# EAGLE board rpicam (EAGLE 6.4)
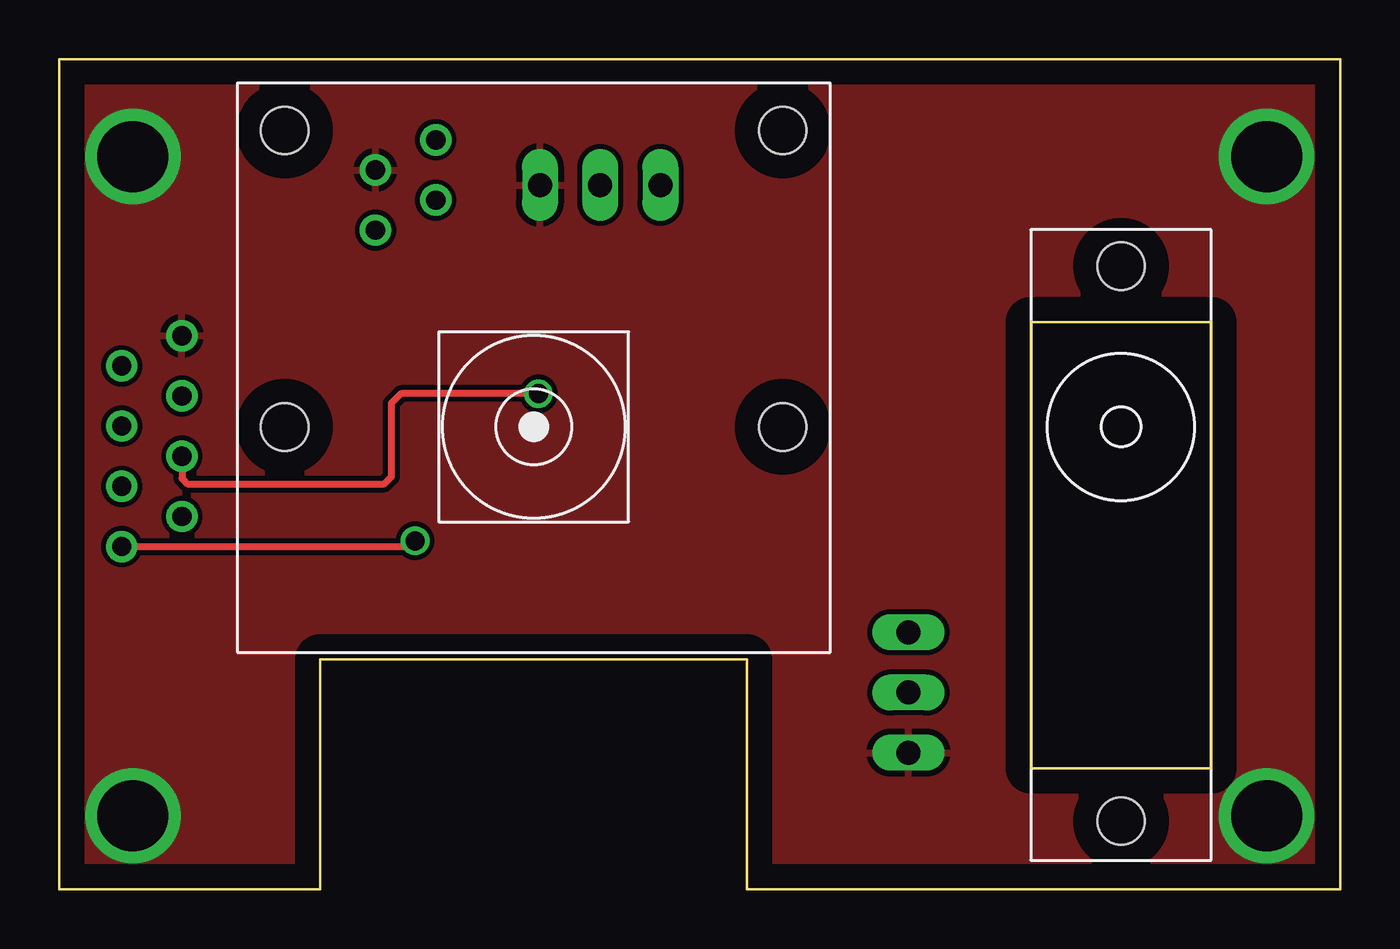
[diagram p0: board, top side]
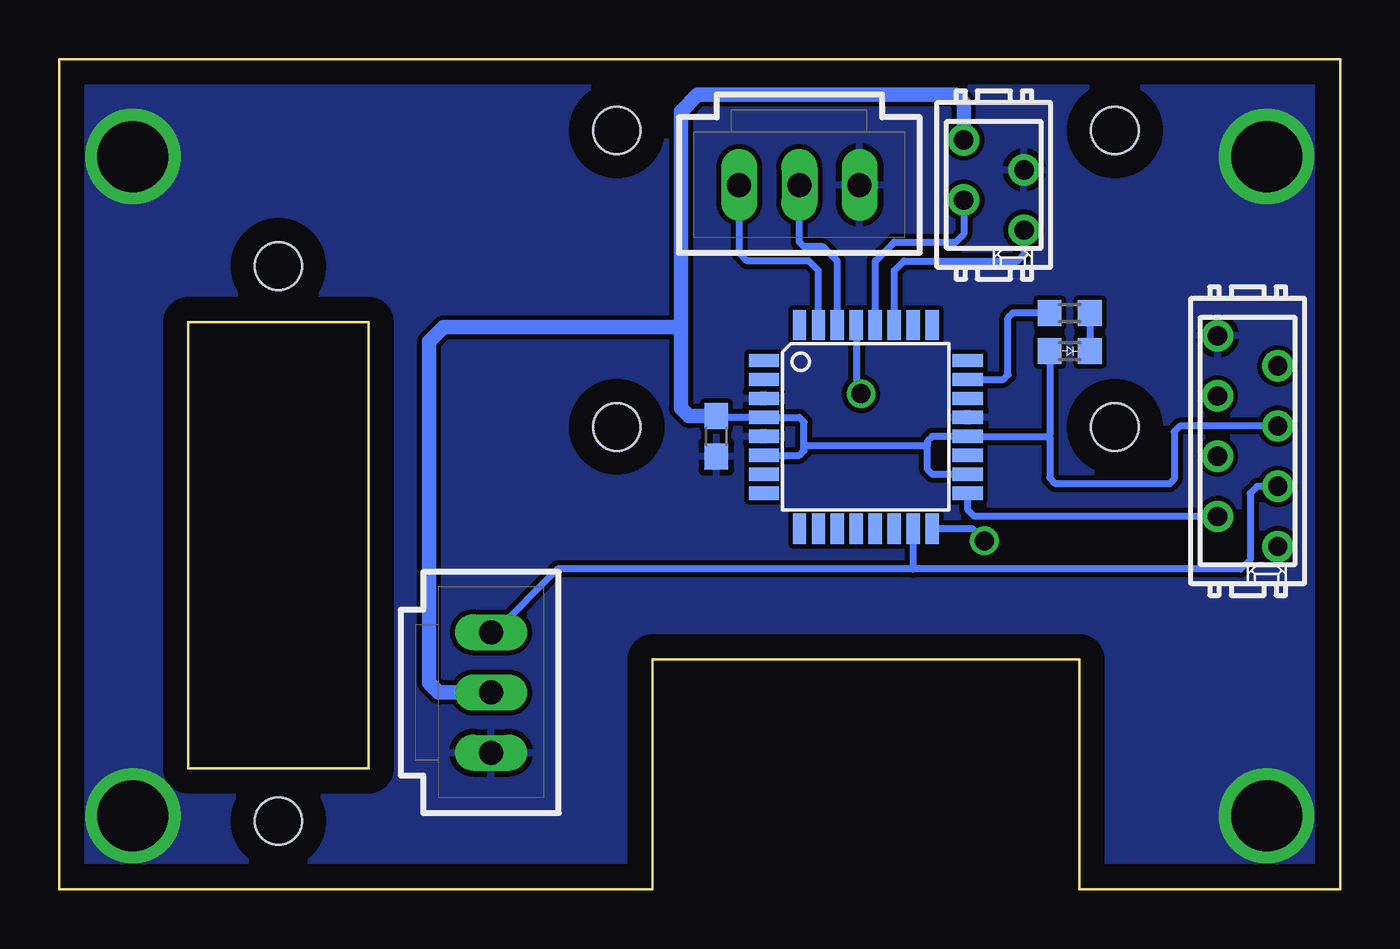
[diagram p1: board, bottom side, seen from below]

Size 54 x 35 mm. Coordinates in mm from the lower left corner, seen from the top.
Outline: 0,35 54,35 54,0 29,0 29,9.7 11,9.7 11,0 0,0 0,35
Copper layers (1*16): Top 0.035mm / dielectric 1.5mm / Bottom 0.035mm
Design rules "default": minimum track width 10mil, minimum drill 24mil, track to track 8mil, track to pad 8mil, pad to pad 8mil, via to via 8mil, smd to smd 8mil, copper to edge 40mil, drill to drill 8mil, minimum pad ring 10mil, minimum via ring 8mil, stop-mask expansion 4mil, vias tented up to drill 0mil, thermal gap 10mil

## Footprints (pad centres in the part's own frame; a part is rotated, then mirrored left to right if it is on the bottom)
C0603 = smd 1.1 x 1: 1 -0.85,0; 2 0.85,0
MICROMATCH-4 = drill 0.813: 1 1.905,1.27; 2 0.635,-1.27; 3 -0.635,1.27; 4 -1.905,-1.27
TQFP32-08 = smd 1.27 x 0.559: 1 -4.293,2.8; 2 -4.293,2; 3 -4.293,1.2; 4 -4.293,0.4; 5 -4.293,-0.4; 6 -4.293,-1.2; 7 -4.293,-2; 8 -4.293,-2.8; 17 4.293,-2.8; 18 4.293,-2; 19 4.293,-1.2; 20 4.293,-0.4; 21 4.293,0.4; 22 4.293,1.2; 23 4.293,2; 24 4.293,2.8 | smd 0.559 x 1.27: 9 -2.8,-4.293; 10 -2,-4.293; 11 -1.2,-4.293; 12 -0.4,-4.293; 13 0.4,-4.293; 14 1.2,-4.293; 15 2,-4.293; 16 2.8,-4.293; 25 2.8,4.293; 26 2,4.293; 27 1.2,4.293; 28 0.4,4.293; 29 -0.4,4.293; 30 -1.2,4.293; 31 -2,4.293; 32 -2.8,4.293
MICROMATCH-8 = drill 0.813: 1 4.445,1.27; 2 3.175,-1.27; 3 1.905,1.27; 4 0.635,-1.27; 5 -0.635,1.27; 6 -1.905,-1.27; 7 -3.175,1.27; 8 -4.445,-1.27
R0603 = smd 1 x 1.1: 1 -0.85,0; 2 0.85,0
70543-03 = drill 1.016 long: 1 -2.54,0; 2 0,0; 3 2.54,0
D0603 = smd 1 x 1.1: 1 -0.85,0; 2 0.85,0
RPICAM = hole 2: -10.5,0; 10.5,0; -10.5,12.5; 10.5,12.5
HS-35HD = hole 2: 0,-16.62; 0,6.78

## Placement (x,y rotation side)
C1  [C0603]  26.3,19.1 90 bottom
I2C  MICROMATCH-4  [MICROMATCH-4]  14.6,29.7 270 bottom
IC1  MEGA8-AI  [TQFP32-08]  20,19.5 0 bottom
ISP  MICROMATCH-8  [MICROMATCH-8]  3.9,18.9 270 bottom
R1  [R0603]  11.4,24.3 0 bottom
SRV  power  [70543-03]  35.8,8.3 270 bottom
U$1  LED0603  [D0603]  11.4,22.7 0 bottom
U$2  [RPICAM]  20,19.5 0 top
U$3  [HS-35HD]  44.76,19.5 0 top
UART  uart  [70543-03]  22.8,29.7 180 bottom

## Library data of the parts
C1 R1 = rcl
I2C = con-amp-micromatch; MPN: 7-215464-4; OC_FARNELL: 3784629; OC_NEWARK: 19R8124
IC1 = atmel
ISP = con-amp-micromatch; MF: FARNELL; MPN: 7-215464-8; OC_FARNELL: 3784642; OC_NEWARK: 26H0301
SRV UART = con-molex; OC_FARNELL: unknown; OC_NEWARK: unknown
U$1 = wb
U$2 = RaspberryPi
U$3 = servos

## Nets
+5V: C1.2 I2C.4 IC1.4 IC1.6 IC1.18 IC1.20 ISP.5 SRV.2 U$1.1
GND: C1.1 I2C.3 IC1.3 IC1.5 IC1.21 ISP.8 SRV.3 UART.1
LED1_CTRL: IC1.13
LED2_CTRL: IC1.14
MISO: IC1.16 ISP.1
MOSI/SRV_CTRL: IC1.15 ISP.3 SRV.1
N$1: R1.2 U$1.2
N$4: IC1.23 R1.1
RST: IC1.29 ISP.4
RXD: IC1.30 UART.2
SCK: IC1.17 ISP.2
SCL: I2C.2 IC1.28
SDA: I2C.1 IC1.27
TXD: IC1.31 UART.3

## Tracks (layer width: path | path; a pad name or v marks a point on that pad's centre or on a via)
+5V
  Bottom 0.305: IC1.6 22.8,18.3 22.6,18.5 22.6,18.7 | 22.6,18.7 22.6,19.7 22.8,19.9 IC1.4 26.25,19.9 C1.2 | IC1.18 17.2,17.5 17.4,17.7 17.4,18.7 | 17.4,18.7 17.4,18.9 17.2,19.1 IC1.20 12.3,19.1 | 17.4,18.7 22.6,18.7 | ISP.5 6.77,19.54 7,19.3 7,17.3 7.2,17.1 12,17.1 12.25,17.35 12.25,19.1 12.3,19.1 | U$1.1 12.25,19.15 12.3,19.1
  Bottom 0.61: I2C.4 15.87,33.17 16.2,33.5 27.1,33.5 27.8,32.8 27.8,23.6 | 27.8,23.6 27.8,20.3 27.45,19.95 C1.2 | SRV.2 38,8.3 38.4,8.7 38.4,23.1 37.8,23.7 27.9,23.7 27.8,23.6
GND  (via drill 3)
  other vias: 50.9,3.1 3.1,30.9 3.1,3.1 50.9,30.9
  pour Bottom: 0,35.1 54,35.1 54,0.1 0,0.1
  pour Top: 0,35.1 54,35.1 54,0.1 0,0.1
MISO  (via drill 0.8)
  Top 0.305: ISP.1 14.75,14.46 v15,14.7
  Bottom 0.305: v15,14.7 15.51,15.21 IC1.16
MOSI/SRV_CTRL
  Bottom 0.305: ISP.3 3.5,17 3.8,16.7 3.8,13.9 4.2,13.5 18,13.5 | 18,13.5 IC1.15 | 18,13.5 33,13.5 35.66,10.84 SRV.1
N$1
  Bottom 0.305: R1.2 U$1.2
N$4
  Bottom 0.305: R1.1 13.8,24.3 14,24.1 14,21.7 14.2,21.5 IC1.23
RST  (via drill 0.8)
  Top 0.305: ISP.4 5.17,17.33 5.4,17.1 13.7,17.1 14,17.4 14,20.5 14.4,20.9 v20.2,20.9
  Bottom 0.305: IC1.29 20.4,21.1 v20.2,20.9
RXD
  Bottom 0.305: IC1.30 21.2,26.5 21.8,27.1 22.6,27.1 22.8,27.3 UART.2
SCK
  Bottom 0.305: ISP.2 15.43,15.72 15.71,16.01 IC1.17
SCL
  Bottom 0.305: IC1.28 19.6,26.5 18.8,27.3 16.2,27.3 15.87,27.63 I2C.2
SDA
  Bottom 0.305: IC1.27 18.8,26.1 18.4,26.5 13.6,26.5 13.33,26.77 I2C.1
TXD
  Bottom 0.305: IC1.31 22,26.1 22.4,26.5 25,26.5 25.34,26.84 UART.3